# Allegro board LEXICON_GLOVE_8.brd
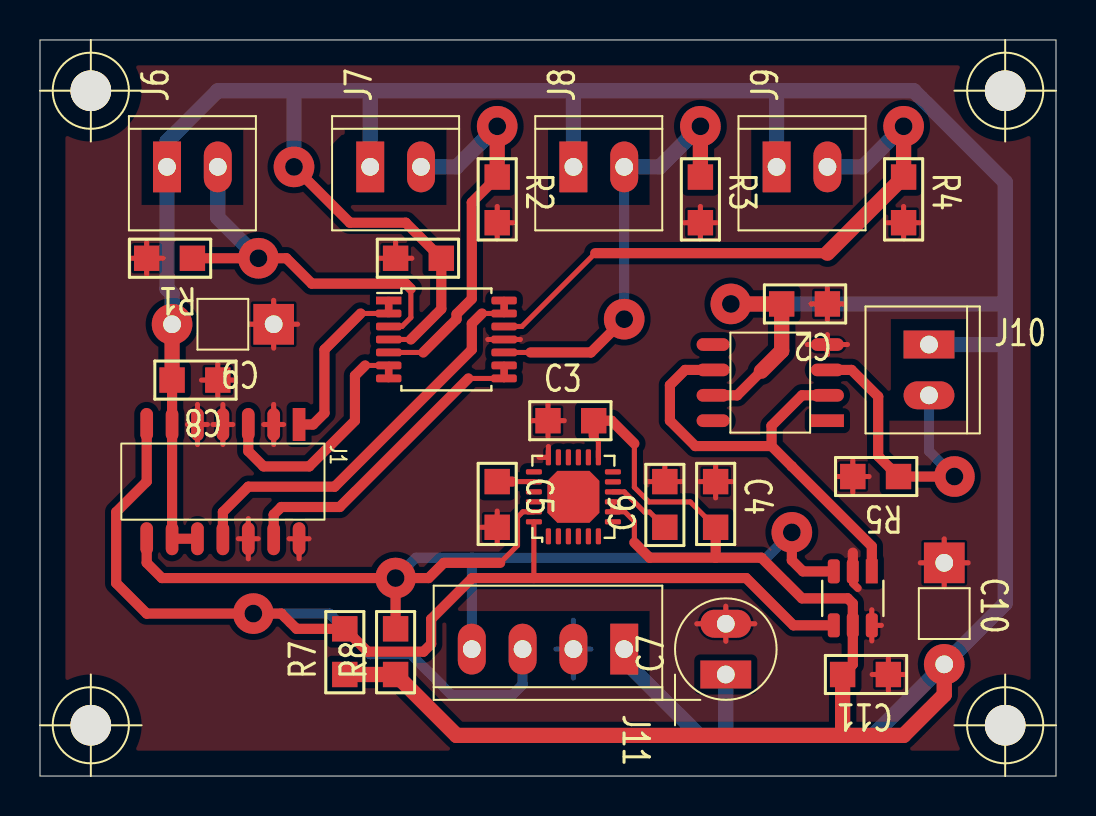
[diagram p0: board, top side]
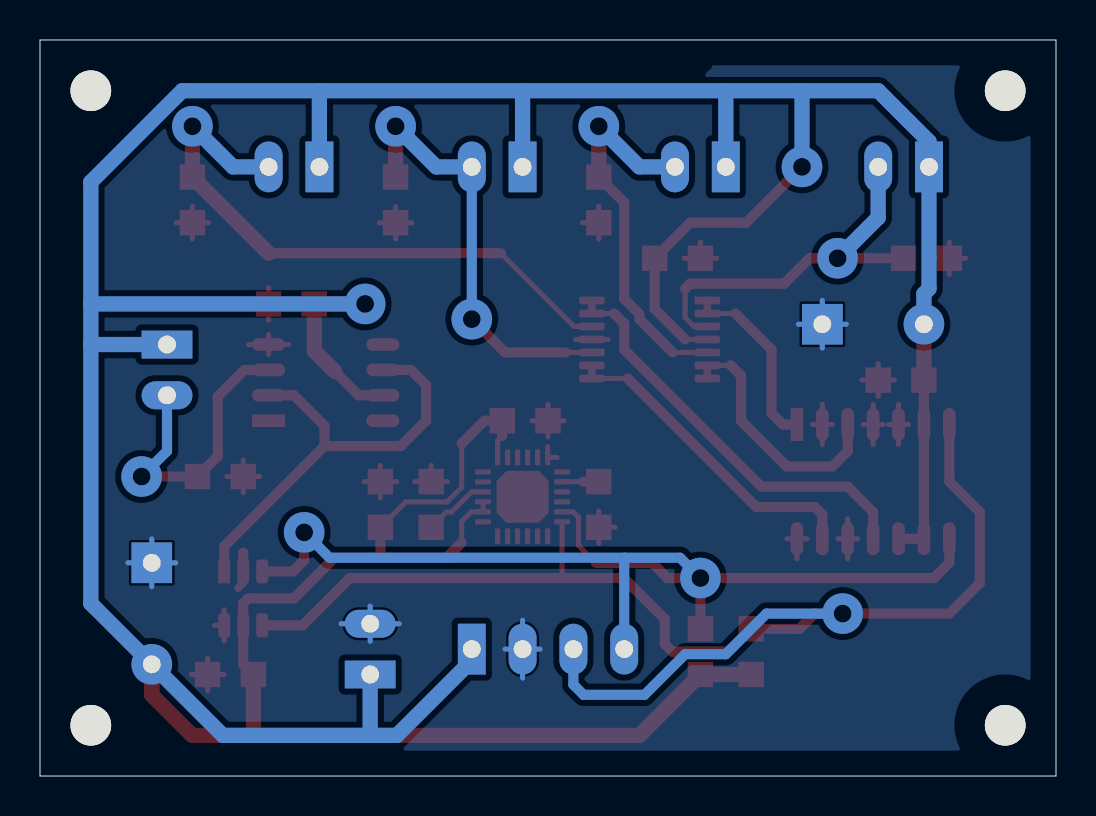
[diagram p1: board, bottom side, seen from below]

Outline 50.8 x 36.83 mm; copper layers: TOP, BOTTOM. Coordinates in mm from the lower left corner of the outline.
Outline path: 0,36.83 0,0 50.8,0 50.8,36.83 0,36.83

## Design rules (mm)
constraint set DEFAULT: min track width 0.254

## Placement (name value [footprint] x y rotation side)
C1  100n  [GU-R0805]  17.78 25.91 0 top
C2  100n  [GU-R0805]  39.37 23.62 180 top
C3  100n  [GU-R0805]  25.4 17.78 0 top
C4  10n  [GU-R0805]  33.78 14.73 270 top
C5  2n2  [GU-R0805]  22.86 14.73 270 top
C6  100n  [GU-R0805]  31.24 12.45 90 top
C7  10u  [GU-CAPCYL100]  34.29 5.08 90 top
C8  100n  [GU-R0805]  8.89 19.81 180 top
C9  10u  [GU-RC200]  11.68 22.61 180 top
C10  10u  [GU-RC200]  45.21 10.67 270 top
C11  100n  [GU-R0805]  42.42 5.08 180 top
J1  MCP3428  [GU-SOIC14]  9.14 14.73 270 top
J3  MCP3421  [SOT23-6P95_280X145L45X37]  40.64 8.89 180 top
J5  MPU-6050  [QFN25P50_400X400X95L35X24T260]  26.67 13.97 0 top
J6  F1  [GU-MOLEX2]  6.35 30.48 90 top
J7  F2  [GU-MOLEX2]  16.51 30.48 90 top
J8  F3  [GU-MOLEX2]  26.67 30.48 90 top
J9  F4  [GU-MOLEX2]  36.83 30.48 90 top
J10  F5  [GU-MOLEX2]  44.45 21.59 0 top
J11  PI  [GU-MOLEX4]  29.21 6.35 270 top
NOREF  -  [unnamed]  48.26 2.54 0 top
NOREF#2  -  [unnamed]  2.54 34.29 0 top
NOREF#3  -  [unnamed]  2.54 2.54 0 top
NOREF#4  -  [unnamed]  48.26 34.29 0 top
R1  33k  [GU-R0805]  7.62 25.91 180 top
R2  33k  [GU-R0805]  22.86 29.97 270 top
R3  33k  [GU-R0805]  33.02 29.97 270 top
R4  33k  [GU-R0805]  43.18 29.97 270 top
R5  33k  [GU-R0805]  42.93 14.99 180 top
R7  10k  [GU-R0805]  15.24 5.08 90 top
R8  10k  [GU-R0805]  17.78 5.08 90 top
U1  TL074  [SOP14P65_500X640X120L60X24]  20.32 21.84 270 top
U2  TL071  [GU-SOIC8]  39.37 17.78 180 top

## Library data of the parts
C1-C6 C8-C11 = CAP NP
C7 = C
J1 = CON14C
J3 = CON6AP_0
J5 = CON24C_2
J6-J10 = CON2
J11 = CON4
R1-R5 R7 R8 = RESISTOR
U1 = TL074
U2 = TL071_1

## Footprints (pads in the part's own frame, mm; a bottom-side part is the same pattern mirrored in y, then rotated)
GU-CAPCYL100
  rect 1.397x2.54 hole 0.889: 1(0,0)
  oval 1.397x2.54 hole 0.889: 2(2.54,0)
GU-MOLEX2
  rect 2.54x1.397 hole 0.889: 1(0,0)
  oval 2.54x1.397 hole 0.889: 2(0,-2.54)
GU-MOLEX4
  rect 2.54x1.397 hole 0.889: 1(0,0)
  oval 2.54x1.397 hole 0.889: 2(0,-2.54) 3(0,-5.08) 4(0,-7.62)
GU-R0805
  rect 1.27x1.27 smd: 1(0,0) 2(2.286,0)
GU-RC200
  rect 2.032x2.032 hole 0.889: 1(0,0)
  round 2.032 hole 0.889: 2(5.08,0)
GU-SOIC8
  rect 1.651x0.635 smd: 1(0,0)
  oval 1.651x0.635 smd: 2(0,-1.27) 3(0,-2.54) 4(0,-3.81) 5(5.715,-3.81) 6(5.715,-2.54) 7(5.715,-1.27) 8(5.715,0)
GU-SOIC14
  rect 1.651x0.635 smd: 1(-2.857,3.81)
  oval 1.651x0.635 smd: 2(-2.857,2.54) 3(-2.857,1.27) 4(-2.857,0) 5(-2.857,-1.27) 6(-2.857,-2.54) 7(-2.857,-3.81) 8(2.857,-3.81) 9(2.857,-2.54) 10(2.857,-1.27) 11(2.857,0) 12(2.857,1.27) 13(2.857,2.54) 14(2.857,3.81)
QFN25P50_400X400X95L35X24T260
  rrect 0.26x0.8 smd: 1(-1.25,-1.975) 2(-0.75,-1.975) 3(-0.25,-1.975) 4(0.25,-1.975) 5(0.75,-1.975) 6(1.25,-1.975) 13(1.25,1.975) 14(0.75,1.975) 15(0.25,1.975) 16(-0.25,1.975) 17(-0.75,1.975) 18(-1.25,1.975)
  rrect 0.8x0.26 smd: 7(1.975,-1.25) 8(1.975,-0.75) 9(1.975,-0.25) 10(1.975,0.25) 11(1.975,0.75) 12(1.975,1.25) 19(-1.975,1.25) 20(-1.975,0.75) 21(-1.975,0.25) 22(-1.975,-0.25) 23(-1.975,-0.75) 24(-1.975,-1.25)
  rrect 2.6x2.6 smd: 25(0,0)
SOP14P65_500X640X120L60X24
  rect 0.39x1.27 smd: 1(-1.95,-2.885)
  rrect 0.39x1.27 smd: 2(-1.3,-2.885) 3(-0.65,-2.885) 4(0,-2.885) 5(0.65,-2.885) 6(1.3,-2.885) 7(1.95,-2.885) 8(1.95,2.885) 9(1.3,2.885) 10(0.65,2.885) 11(0,2.885) 12(-0.65,2.885) 13(-1.3,2.885) 14(-1.95,2.885)
SOT23-6P95_280X145L45X37
  rect 0.6x1.2 smd: 1(-0.95,-1.35)
  rrect 0.6x1.2 smd: 2(0,-1.35) 3(0.95,-1.35) 4(0.95,1.35) 5(0,1.35) 6(-0.95,1.35)
unnamed
  round 2.032 hole 3.962 unplated: (0,0)

## Nets
3V3: C1.2 C2.2 C3.2 C4.2 C7.1 C8.2 C9.2 C10.2 C11.2 J1.6 J1.9 J1.10 J3.5 J5.8 J5.9 J5.13 J6.1 J7.1 J8.1 J9.1 J10.1 J11.1 R7.1 R8.1 U1.4 U2.7
GND: C1.1 C2.1 C3.1 C4.1 C5.2 C6.2 C7.2 C8.1 C9.1 C10.1 C11.1 J1.2 J1.4 J1.5 J1.12 J1.14 J3.2 J3.6 J5.18 J11.2 R1.2 R2.2 R3.2 R4.2 R5.2 U1.11 U2.4(V-)
FING1: J1.1 U1.1 U1.2
FING2: J1.3 U1.6 U1.7
FING3: J1.13 U1.8 U1.9
FING4: J1.11 U1.13 U1.14(OUT)
FING5: J3.1 U2.2 U2.6
SCL: J1.8 J3.3 J5.23 J11.4 R8.2
SDA: J1.7 J3.4 J5.24 J11.3 R7.2
N00544: J6.2 R1.1 U1.3
N00572: J7.2 R2.1 U1.5
N00597: J8.2 R3.1 U1.10
N00622: J9.2 R4.1 U1.12
N00734: J10.2 R5.1 U2.3
N04896: C5.1 J5.20
N05186: C6.1 J5.10

Pads without a net: J5 1 2 3 4 5 6 7 11 12 14 15 16 17 19 21 22 25; U2 1 5 8

## Via types
v1: diameter 2.032, hole 0.889, TOP to BOTTOM, 11 vias

## Routing (per net, layer and track width the routed paths; a pad name or vN(x,y) marks a point on that pad's centre or on a via; arc(x,y) is an arc through that point)
3V3: length 239.7
  TOP w0.254: 29.72,11.68 29.72,12.74 29.24,13.22 J5.8 J5.9 ; J5.13 27.92,16.78 27.69,17.02 ; 29.72,16.64 29.72,14.45 30.45,13.72 32.51,13.72 C4.2 ; U1.4 18.54,21.84
  TOP w0.508: 29.72,11.68 30.48,10.92 33.78,10.92 ; 27.69,17.02 C3.2 28.57,17.78 29.72,16.64 ; 33.78,10.92 36.07,10.92 38.1,8.89 40.39,8.89 40.64,8.64 J3.5 40.64,5.59 C11.2 ; 33.78,10.92 C4.2 ; v1(12.7,30.48) 15.49,27.69 18.29,27.69 C1.2 20.07,23.37 18.54,21.84 ; C8.2 J1.6 J1.9 J1.10 ; 36.07,20.26 34.86,19.05 U2.7
  TOP w0.762: 40.13,2.03 43.18,2.03 45.21,4.06 C10.2 ; 40.13,2.03 20.83,2.03 R8.1 R7.1 ; 40.13,2.03 C11.2 ; v1(34.54,23.62) C2.2 37.08,21.27 36.07,20.26 ; C9.2 C8.2
  BOTTOM w0.762: J8.1 26.67,34.29 ; 26.67,34.29 36.83,34.29 ; 26.67,34.29 16.51,34.29 ; v1(34.54,23.62) 48.26,23.62 ; 48.26,23.62 48.26,21.59 ; 48.26,23.62 48.26,29.72 43.69,34.29 36.83,34.29 ; 12.7,34.29 8.89,34.29 6.35,31.75 J6.1 6.35,24.38 6.6,24.13 C9.2 ; 12.7,34.29 16.51,34.29 ; 12.7,34.29 v1(12.7,30.48) ; 36.83,34.29 J9.1 ; 34.29,2.03 32.96,2.03 29.21,5.78 J11.1 ; 34.29,2.03 C7.1 ; 34.29,2.03 41.66,2.03 C10.2 48.26,8.64 48.26,21.59 ; 48.26,21.59 J10.1 ; J7.1 16.51,34.29
GND: length 95.7
  TOP w0.254: C8.1 9.7,19.81 ; C8.1 8.89,20.63 ; C8.1 8.08,19.81 ; C8.1 8.89,19 ; 41.6,5.08 C11.1 ; C11.1 42.42,5.89 ; C11.1 43.23,5.08 ; C11.1 42.42,4.27 ; 11.19,17.59 J1.2 ; J1.2 11.68,18.59 ; J1.2 11.68,16.59 ; J1.2 12.18,17.59 ; 34.29,6.74 C7.2 ; C7.2 35.74,7.62 ; C7.2 32.84,7.62 ; C7.2 34.29,8.5 ; 44.02,10.67 C10.1 ; C10.1 46.41,10.67 ; C10.1 45.21,9.47 ; C10.1 45.21,11.86 ; R2.2 23.67,27.69 ; R2.2 22.86,26.87 ; R2.2 22.86,28.5 ; C5.2 22.86,13.26 ; C5.2 22.86,11.63 ; C5.2 22.05,12.45 ; C9.1 11.68,23.8 ; C9.1 11.68,21.41 ; C9.1 12.88,22.61 ; C9.1 10.49,22.61 ; 7.38,17.59 J1.5 ; J1.5 8.37,17.59 ; J1.5 7.87,16.59 ; J1.5 7.87,18.59 ; 24.02,21.84 U1.11 22.39,21.84 ; 40.64,14.17 R5.2 ; R5.2 39.83,14.99 ; R5.2 40.64,15.8 ; R5.2 41.45,14.99 ; J1.4 9.64,17.59 ; J1.4 9.14,16.59 ; J1.4 9.14,18.59 ; J1.4 8.65,17.59 ; J1.14 13.45,11.87 ; J1.14 12.46,11.87 ; J1.14 12.95,10.87 ; 16.97,25.91 C1.1 ; C1.1 17.78,26.72 ; C1.1 18.59,25.91 ; 32.21,27.69 R3.2 ; R3.2 33.02,28.5 ; R3.2 33.83,27.69 ; R3.2 33.02,26.87 ; R1.2 6.15,25.91 ; R1.2 5.33,25.09 ; R1.2 4.52,25.91 ; R1.2 5.33,26.72 ; C6.2 31.24,15.55 ; C6.2 30.43,14.73 ; C6.2 32.06,14.73 ; C4.1 34.6,14.73 ; C4.1 32.97,14.73 ; C4.1 33.78,13.92 ; C4.1 33.78,15.55 ; 38.56,23.62 C2.1 ; C2.1 40.18,23.62 ; C2.1 39.37,24.44 ; C2.1 39.37,22.81 ; 42.37,27.69 R4.2 ; R4.2 43.18,28.5 ; R4.2 43.99,27.69 ; R4.2 43.18,26.87 ; 9.92,11.87 J1.12 ; J1.12 10.91,11.87 ; J1.12 10.41,12.88 ; J1.12 10.41,10.87 ; U2.4 40.37,21.59 ; U2.4 39.37,22.09 ; U2.4 38.37,21.59 ; U2.4 39.37,21.09 ; C3.1 25.4,18.59 ; C3.1 26.21,17.78 ; C3.1 24.59,17.78 ; C3.1 25.4,16.97 ; 25.42,16.49 J5.18 24.95,15.95 ; 41.59,6.76 J3.6 ; J3.6 41.59,8.32 ; J3.6 42.07,7.54
  TOP w0.381: 40.89,9.4 40.64,9.65 J3.2
  TOP w0.508: J3.2 40.64,11.18
  BOTTOM w0.254: 34.29,6.74 C7.2 ; C7.2 32.84,7.62 ; C7.2 35.74,7.62 ; C7.2 34.29,8.5 ; 10.49,22.61 C9.1 ; C9.1 11.68,21.41 ; C9.1 11.68,23.8 ; C9.1 12.88,22.61 ; C10.1 45.21,11.86 ; C10.1 45.21,9.47 ; C10.1 44.02,10.67 ; C10.1 46.41,10.67 ; 25.79,6.35 J11.2 ; J11.2 26.67,4.9 ; J11.2 26.67,7.8 ; J11.2 27.55,6.35
FING1: length 9.3
  TOP w0.254: U1.2 16.03,23.14
  TOP w0.381: U1.2 U1.1
  TOP w0.508: 16.03,23.14 14.22,21.34 14.22,18.16 13.65,17.59 J1.1
FING2: length 12.7
  TOP w0.254: U1.6 16.26,20.54
  TOP w0.381: U1.7 U1.6
  TOP w0.508: 16.26,20.54 15.75,20.04 15.75,17.78 13.46,15.49 11.18,15.49 10.41,16.26 J1.3
FING3: length 16.2
  TOP w0.254: U1.8 21.42,19.89
  TOP w0.381: U1.8 U1.9
  TOP w0.508: 21.42,19.89 14.99,13.46 12.06,13.46 11.68,13.08 J1.13
FING4: length 20.9
  TOP w0.254: 22.1,23.14 U1.13
  TOP w0.381: U1.13 U1.14
  TOP w0.508: 22.1,23.14 21.59,22.64 21.59,21.34 14.73,14.48 10.41,14.48 9.14,13.21 J1.11
FING5: length 22.6
  TOP w0.508: U2.6 32.26,20.32 31.5,19.56 31.5,17.78 32.77,16.51 36.58,16.51 ; 36.58,16.51 36.58,17.53 38.1,19.05 U2.2 ; 36.58,16.51 37.59,15.49 41.59,11.5 J3.1
SCL: length 54.7
  TOP w0.254: J5.23 24.14,13.22 23.88,12.95 23.88,11.54 23.01,10.67
  TOP w0.508: v1(17.78,9.91) 6.1,9.91 5.33,10.67 J1.8 ; v1(17.78,9.91) R8.2 ; v1(17.78,9.91) 19.43,9.91 20.19,10.67 23.01,10.67 ; J3.3 38.15,10.24 37.59,10.79 v1(37.59,12.19)
  BOTTOM w0.508: 21.59,10.92 18.8,10.92 v1(17.78,9.91) ; 21.59,10.92 36.32,10.92 v1(37.59,12.19) ; 21.59,10.92 J11.4
SDA: length 69.1
  TOP w0.254: J5.24 24.69,9.91
  TOP w0.508: J3.4 37.67,7.54 35.31,9.91 21.61,9.91 19.56,7.85 19.56,6.6 19.18,6.22 16.38,6.22 R7.2 12.83,7.37 12.06,8.13 v1(10.67,8.13) 5.33,8.13 3.81,9.65 3.81,13.21 5.33,14.73 J1.7
  BOTTOM w0.508: v1(10.67,8.13) 14.48,8.13 16.51,6.1 18.54,6.1 20.57,4.06 23.62,4.06 24.13,4.57 J11.3
N00544: length 19.7
  TOP w0.254: U1.3 18.1,22.49 18.54,22.94 18.54,24.38
  TOP w0.508: R1.1 v1(10.92,25.91) 12.32,25.91 13.59,24.64 18.29,24.64 18.54,24.38
  BOTTOM w0.762: J6.2 8.89,27.94 v1(10.92,25.91)
N00572: length 19.2
  TOP w0.254: 19.16,21.19 U1.5
  TOP w0.508: R2.1 21.59,28.7 21.59,23.88 20.83,23.11 20.83,22.86 19.16,21.19
  TOP w0.762: v1(22.86,32.51) R2.1
  BOTTOM w0.762: v1(22.86,32.51) 20.83,30.48 J7.2
N00597: length 21.5
  TOP w0.254: 24.53,21.19 U1.10
  TOP w0.508: v1(29.21,22.86) 27.54,21.19 24.53,21.19
  TOP w0.762: v1(33.02,32.51) R3.1
  BOTTOM w0.508: v1(29.21,22.86) J8.2
  BOTTOM w0.762: v1(33.02,32.51) 30.99,30.48 J8.2
N00622: length 30.3
  TOP w0.254: 27.76,26.16 24.09,22.49 U1.12
  TOP w0.508: 39.37,26.16 27.76,26.16
  TOP w0.762: v1(43.18,32.51) R4.1 39.37,26.16
  BOTTOM w0.762: v1(43.18,32.51) 41.15,30.48 J9.2
N00734: length 14.9
  TOP w0.508: U2.3 40.58,20.32 41.91,18.99 41.91,16 R5.1 v1(45.72,14.99)
  BOTTOM w0.508: v1(45.72,14.99) 44.45,16.26 J10.2
N04896: length 1.8
  TOP w0.254: J5.20 24.68,14.73 23.62,14.73
  TOP w0.508: 23.62,14.73 C5.1
N05186: length 3.3
  TOP w0.254: C6.1 30.48,13.21 30.23,13.21 29.21,14.22 J5.10

## Copper pours and planes (outline as drawn; the poured copper is in the pictures)
GND on TOP: 1.27,35.56 49.53,35.56 49.53,1.27 1.27,1.27 ; 11 cut-outs
GND on BOTTOM: 1.27,35.56 49.53,35.56 49.53,1.27 1.27,1.27 ; 2 cut-outs
